# Altium PCB ir-rf.PcbDoc
Units mm, origin at the board's own origin, x right, y up, seen from the top; angles counter-clockwise.
Board outline 151 x 86.38 mm, 2 copper layers (Top Layer, Bottom Layer); 16 components, 13 nets, 56 pads, 0 vias.
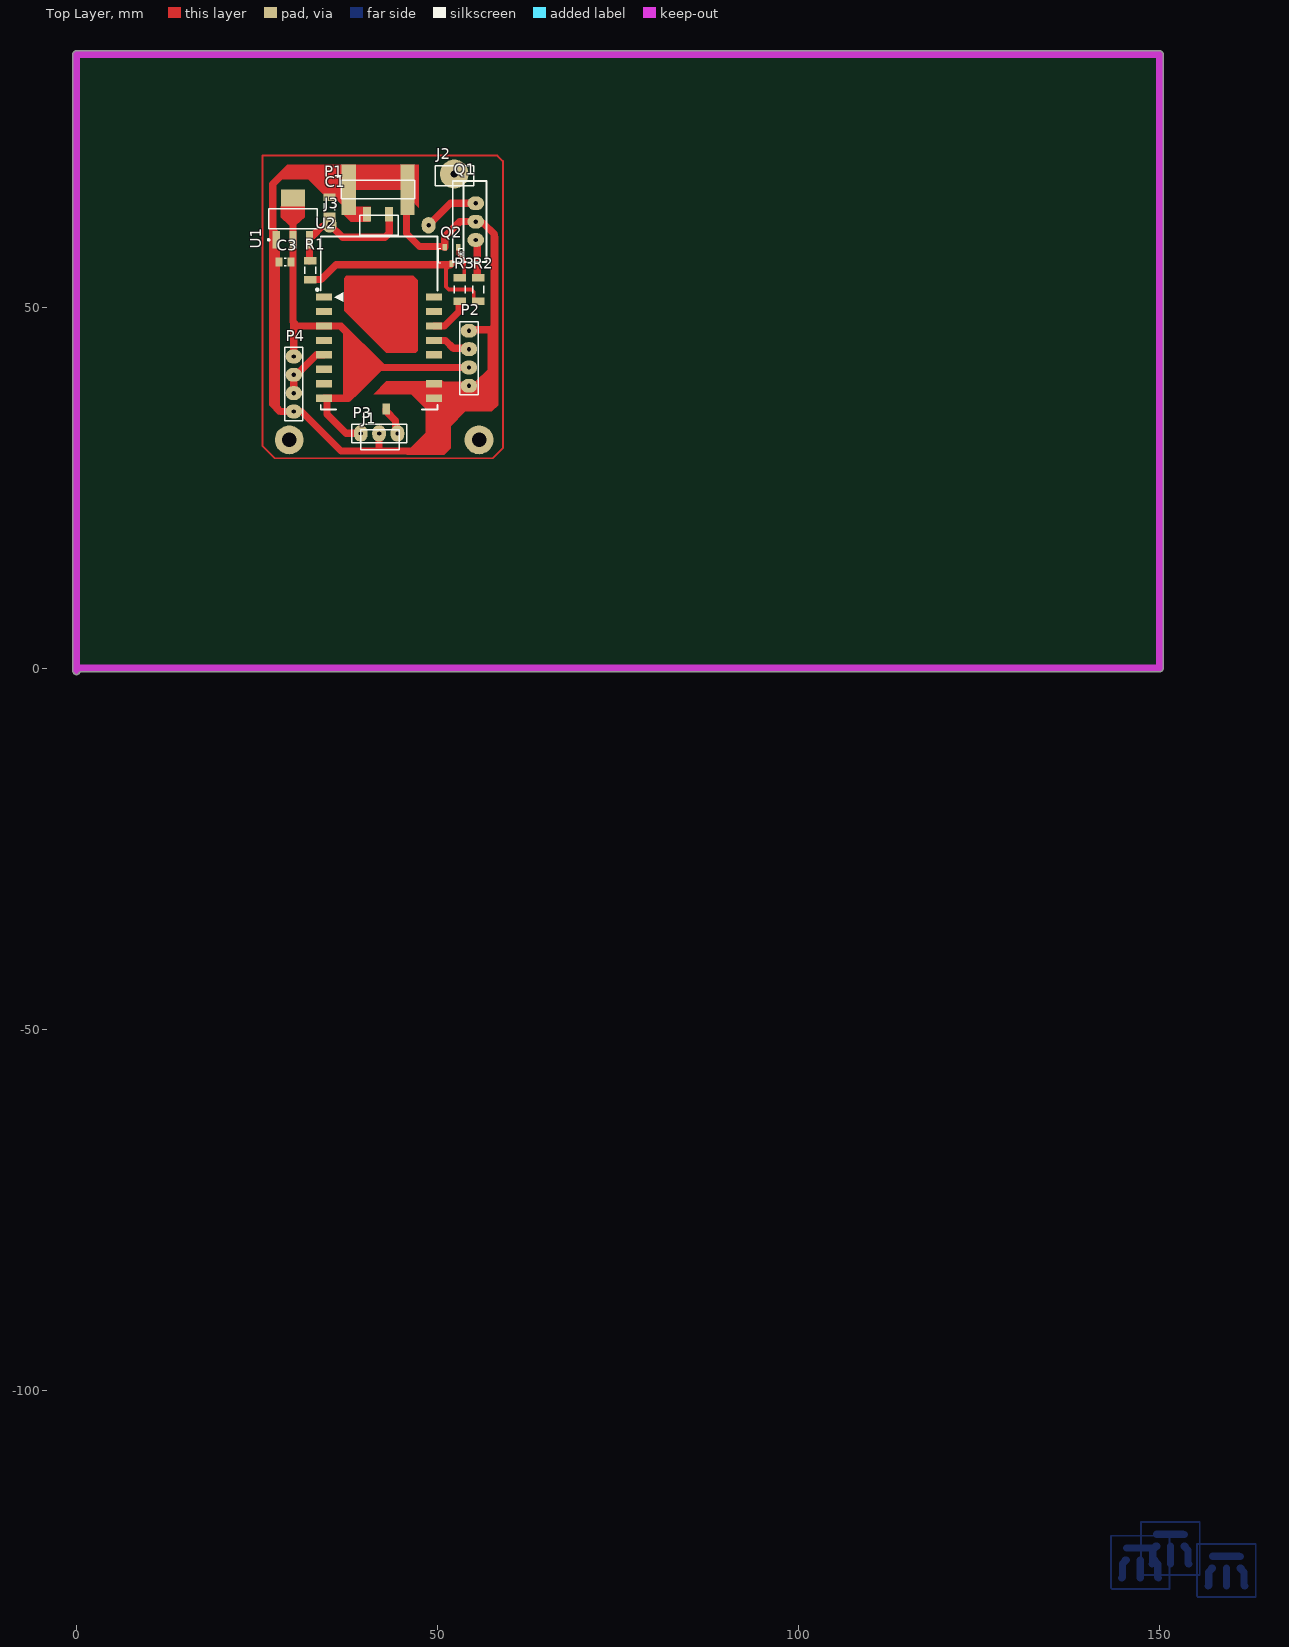
[diagram p0: Top Layer view]
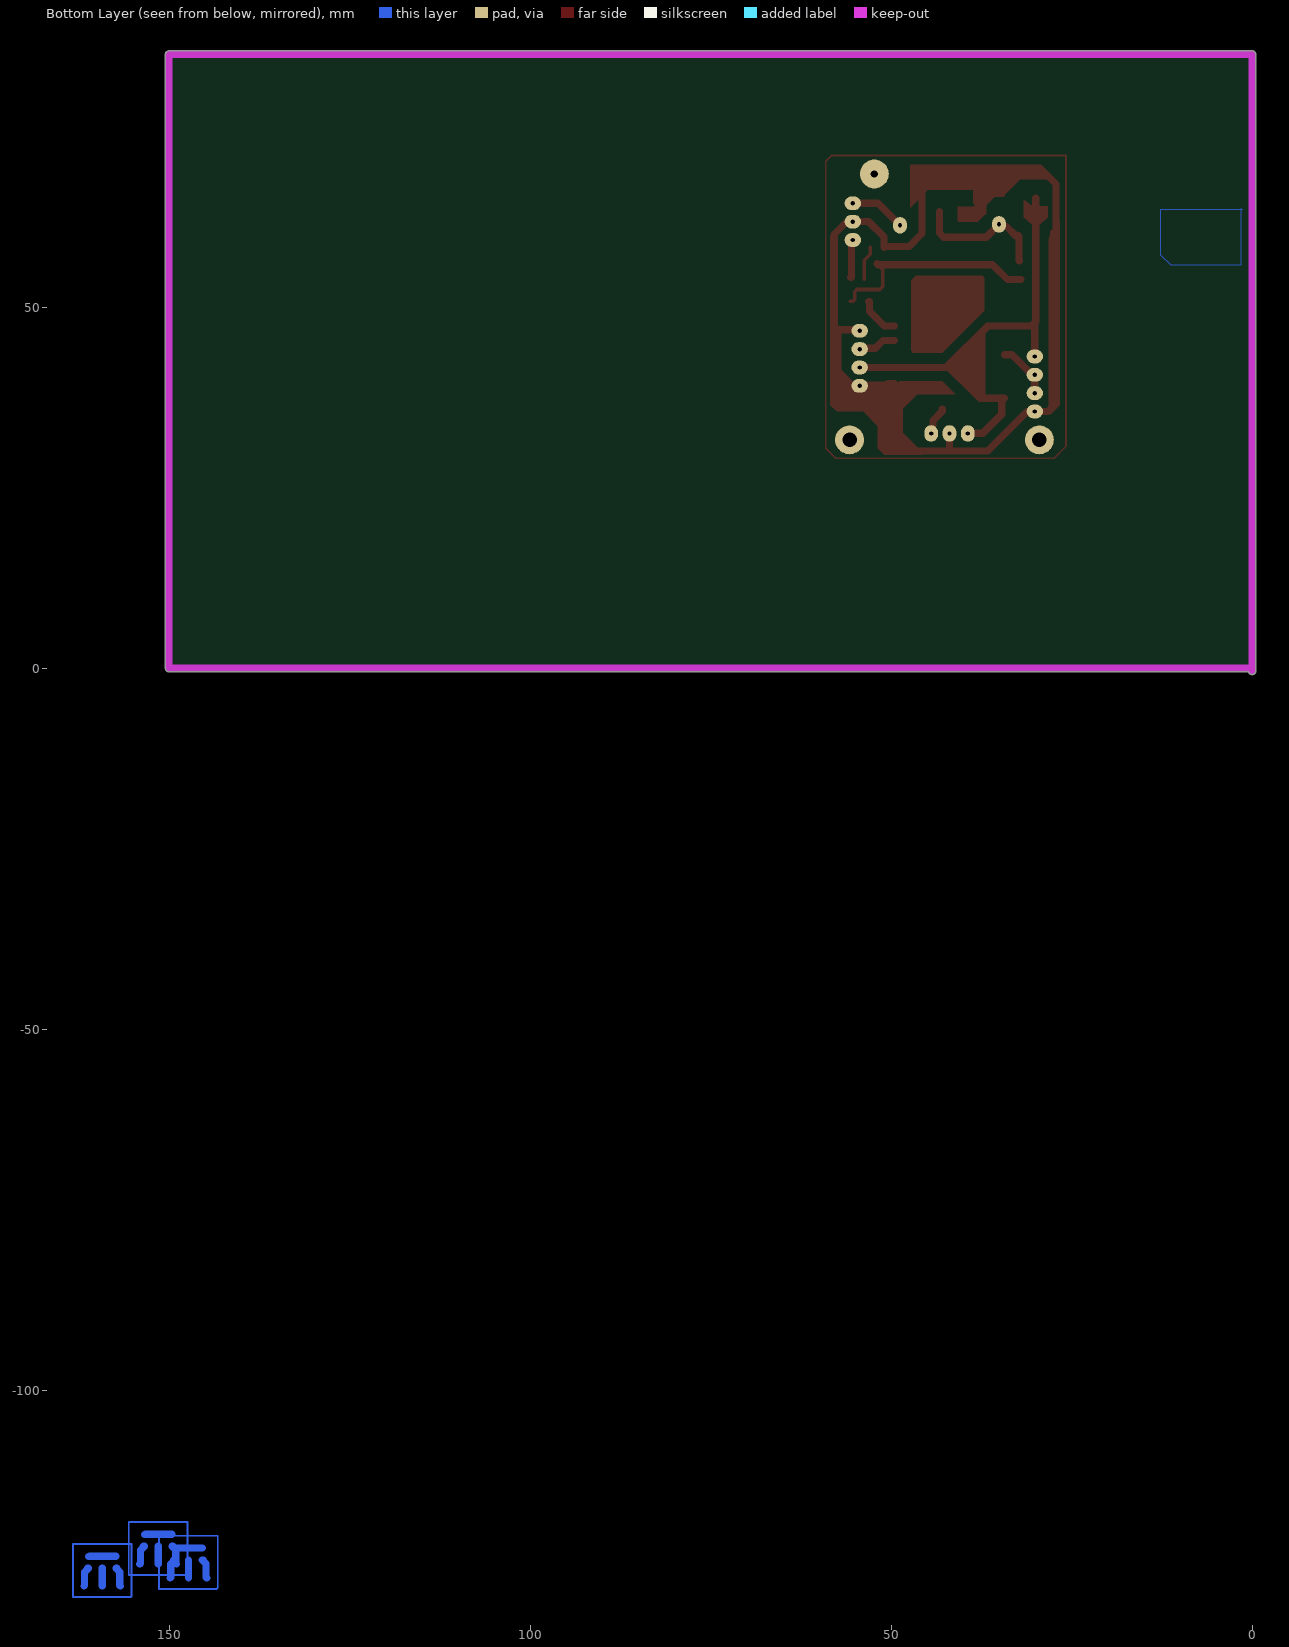
[diagram p1: Bottom Layer view, seen from below]
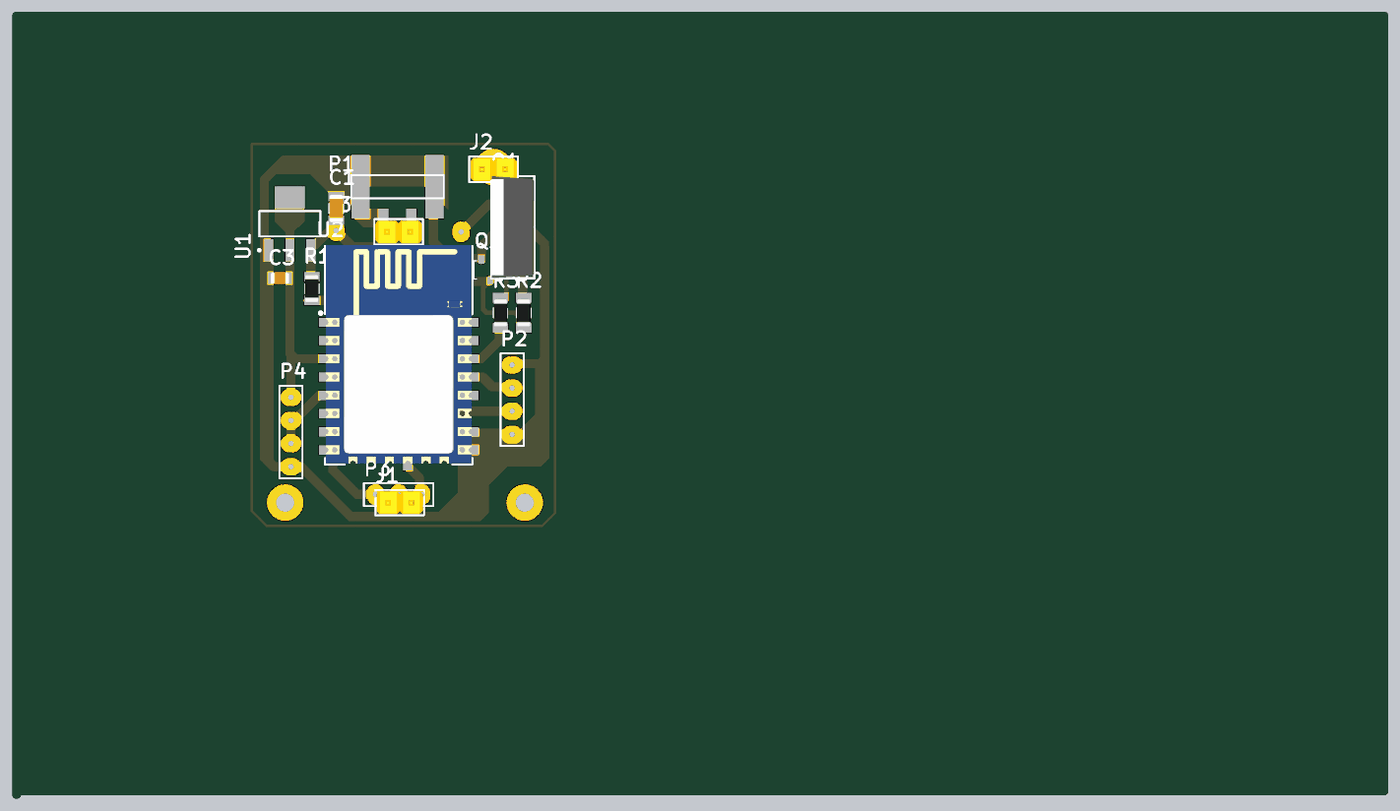
[diagram p2: 3D render of the assembled board from above, using the file's embedded part models]

## Layer stack, top to bottom
Top Solder: solder mask 0.0102, Solder Resist, Dk 3.5
Top Layer: signal copper 0.0356
Dielectric 1: dielectric 0.32, FR-4, Dk 4.8
Bottom Layer: signal copper 0.0356
Bottom Solder: solder mask 0.0102, Solder Resist, Dk 3.5

## Board outline
-0.5,-0.381 -0.5,85 cw(c0,85) 0,85.5 150,85.5 cw(c150,85) 150.5,85 150.5,0 cw(c150,0) 150,-0.5 0.486,-0.5 cw(c0,-0.381)

## Design rules (kind name [scope] priority, off if disabled: settings)
Clearance Clearance_1 [InPolygon] p1: gap=0.8 ignorepadtopadclearanceinfootprint=FALSE
Clearance [All] p2: gap=0.254 ignorepadtopadclearanceinfootprint=FALSE except(0: Arc-Hole Track-Hole SMDPad-Hole THPad-Hole Via-Hole Fill-Hole Poly-Hole Region-Hole Text-Hole)
PolygonConnect [All] p1: connectstyle=Relief reliefconductorwidth=0.254 reliefentries=4 polygonreliefangle="90 Angle" airgapwidth=0.254
RoomDefinition ir-rf [InComponentClass('ir-rf')] p1: confinementstyle=ConfineIn formatcopy=TRUE lockcomponents=FALSE outline 144.907,-4.953 247.904,-4.953 247.904,23.114 144.907,23.114
RoutingLayers [All] p1: top layer_v5=FALSE bottom layer_v5=TRUE
RoutingVias [All] p1: holewidth=0.711 width=2.5 viastyle="Through Hole" minholewidth=0.711 minwidth=1.27 maxholewidth=0.711 maxwidth=2
SolderMaskExpansion [All] p1: expansion=0.102 istentingtop=FALSE
Width [All] p1: maxlimit=3 minlimit=0.5 preferedwidth=1
29 further rules are at their usual default settings.

## Components (designator, comment, footprint, x,y, rotation, side; value= is the part's Value field where it differs from the comment)
C1 "=Value" "CAP 1206" 35.052,63.881 r90 top
C3 "=Value" "CAP 0805" 28.829,56.261 r180 top
J1 "Header2X1" "Header 2X1"#1 42.037,31.623 r180 top
J2 "Header2X1" "Header 2X1"#2 52.324,68.199 r180 top
J3 "Header2X1" "Header 2X1"#3 41.91,61.341 r180 top
P1 "Header 4" HDR1X4#1 45.593,66.294 r180 top
P2 "Header 4" HDR1X4#2 54.356,46.736 r270 top
P3 "Header 3" HDR1X3 44.45,32.512 r180 top
P4 "Header 4" HDR1X4#2 30.099,43.18 r270 top
Q1 "MODEL" TO-220 55.297,61.849 r90 top
Q2 "MMBT3904-TP" SOT23-3 53.213,57.157 r180 top
R1 "10K" "RES 1206 (3216X08L)"#1 32.385,55.118 r90 top
R2 "10K" "RES 1206 (3216X08L)"#2 55.626,52.451 r90 top
R3 "10K" "RES 1206 (3216X08L)"#2 53.086,52.451 r90 top
U1 "LM1117MP-3.3" MP04A_N 29.972,62.23 r90 top
U2 "ESP_12_E" ESP_12_E 33.905,51.403 r0 top

## Footprints (in the part's own frame and the unit in brackets; to place one, negate y for a bottom-side part, rotate by r counter-clockwise, add the part's x,y. Pads: shape width x height; smd on the part's side, far side on the other; paste and mask are expansions set on the pad)
"CAP 0805" [mm]
  rect 0.95x1.3 smd: 1(-0.889,0) 2(0.761,0)
  silkscreen extent -0.21,-0.55 0.09,0.55, body extent -1.08,-0.63 0.95,0.63, height 0.65
"CAP 1206" [mm]
  rect 1.05x1.7 smd: 1(-1.27,0) 2(1.326,0)
  silkscreen extent -0.47,-0.75 0.53,0.75, body extent -1.49,-0.77 1.55,0.75, height 0.75
ESP_12_E [mm] "ESP-12 Wi-Fi Module by AI-Thinker"
  rect 2.25x1 smd: 1(0.375,0) 2(0.375,-2) 3(0.375,-4) 4(0.375,-6) 5(0.375,-8) 6(0.375,-10) 7(0.375,-12) 8(0.375,-14) 15(15.625,-14) 16(15.625,-12) 18(15.625,-8) 19(15.625,-6) 20(15.625,-4) 21(15.625,-2) 22(15.625,0)
  rect 1x1.5 smd: 12(9,-15.5)
  silkscreen extent -0.7,-15.57 16.08,8.37, body extent 0,-15.49 16,8.51, height 2.75
HDR1X3 [mm] "Connector; Header; 3 Position"
  oval 1.905x2.286 hole 0.6: 1(0,0) 2(2.54,0) 3(5.08,0)
  silkscreen extent -1.27,-1.27 6.35,1.27
HDR1X4#1 [mm] "Connector; Header; 4 Position"
  rect 2x7 smd: 1(-0.254,0) 4(7.874,0)
  rect 1.1x2 smd: 2(2.286,3.429) 3(5.334,3.429)
  silkscreen extent -1.27,-1.27 8.89,1.27
HDR1X4#2 [mm] "Connector; Header; 4 Position"
  oval 1.905x2.286 hole 0.6: 1(0,0) 2(2.54,0) 3(5.08,0) 4(7.62,0)
  silkscreen extent -1.27,-1.27 8.89,1.27
"Header 2X1"#1 [mm]
  round 4 hole 2: 1(-13.716,0) 2(12.573,0)
  silkscreen extent -2.67,-1.4 2.67,1.4, body extent -2.54,-1.27 2.54,1.27, height 9.5
"Header 2X1"#2 [mm]
  round 4 hole 1: 2(0,-0.254)
  silkscreen extent -2.67,-1.4 2.67,1.4, body extent -2.54,-1.27 2.54,1.27, height 9.5
"Header 2X1"#3 [mm]
  oval 1.905x2.286 hole 0.6: 1(-6.858,0) 2(6.858,-0.127)
  silkscreen extent -2.67,-1.4 2.67,1.4, body extent -2.54,-1.27 2.54,1.27, height 9.5
MP04A_N [mm] "SOT223, 4-Leads, Body 6.5x3.5mm, Pitch 2.3mm, Lead Span 7mm, IPC Medium Density"
  rect 2.4x1 smd: 1(-2.9,2.3) 2(-2.9,0) 3(-2.9,-2.3)
  rect 2.4x3.3 smd: 4(2.9,0)
  silkscreen extent -3.02,-3.35 1.4,3.47, body extent -1.85,-3.35 1.85,3.35, height 1.8
"RES 1206 (3216X08L)"#1 [mm] "Chip Resistor, 2-Leads, Body 3.2x1.6mm, IPC High Density _ (0.125 W)"
  rect 1.05x1.7 smd: 1(-1.295,0) 2(1.301,0)
  silkscreen extent -0.5,-0.75 0.5,0.75, body extent -1.52,-0.76 1.53,0.76, height 0.6
"RES 1206 (3216X08L)"#2 [mm] "Chip Resistor, 2-Leads, Body 3.2x1.6mm, IPC High Density _ (0.125 W)"
  rect 1.05x1.7 smd: 1(-1.651,0) 2(1.651,0)
  silkscreen extent -0.5,-0.75 0.5,0.75, body extent -1.52,-0.76 1.53,0.76, height 0.6
SOT23-3 [mm]
  rect 0.6x0.9 smd: 1(0.32,-1.15) 2(2.22,-1.15) 3(1.27,1.15)
  silkscreen extent -0.48,-1 3.02,1
TO-220 [mm]
  oval 1.905x2.286 hole 0.6: 1(-2.54,0) 2(0,0) 3(2.54,0)
  silkscreen extent -5.61,-1.5 5.61,3.19, body extent -5.61,-1.5 5.61,3.19, height 19.83

## Part data
C1 C3: library part Capacitor, "Capacitor"
P1 P2 P4: "Header, 4-Pin", LatestRevisionDate=17-Jul-2002, LatestRevisionNote="Re-released for DXP Platform.", Publisher="Altium Limited"
P3: "Header, 3-Pin", LatestRevisionDate=17-Jul-2002, LatestRevisionNote="Re-released for DXP Platform.", Publisher="Altium Limited"
Q1: library part TIP127, "PNP Bipolar Transistor"
Q2: "Bipolar _BJT_ Transistor NPN 40V 200mA 300MHz 350mW Surface Mount SOT-23", Package="SOT-23 Micro Commercial", Availability=Unavailable, MF="Micro Commercial", MP=MMBT3904-TP, Price=None, SnapEDA_Link=https://www.snapeda.com/parts/MMBT3904-TP/Micro%20Commercial/view-part/805928/?ref=snap
R1 R2 R3: library part Resistor, "Resistor", Power="1/4 W", Tolerance=5%
U1: "800mA Low-Dropout Linear Regulator", DigiKeyPartNumber=LM1117MP-3.3CT-ND, Manufacturer="National Semiconductor", PackageTopMarking=XYTT*N05A, PowerWise=N, Code_IPC=SOT223-4, Code_JEDEC=TO-261-AA, ComponentLink1Description="LM1117 Datasheet", ComponentLink1URL=http://www.national.com/ds/LM/LM1117.pdf, ComponentLink2Description="LM1117 Web Page", ComponentLink2URL=http://www.national.com/pf/LM/LM1117.html, ComponentLink3Description="MP04A Package Page", ComponentLink3URL=http://www.national.com/packaging/folders/mp04a.html, CompType="LDO IC", DatasheetVersion=Apr-2006, PackageDescription="Molded SOT-223, 6.50 x 3.56 x 1.6mm Body, 4 Lead, 2.3mm Pitch", PackageReference=MP04A, PackageVersion="revB, Apr-2003", PartNumber=LM1117MP-3.3, PinCount=4, Published=4-Dec-2008, Publisher="Altium Limited", RoHS=O
U2: "ESP-12 Wi-Fi Module by AI-Thinker", IC=ESP8266-EX, Vendor=Ai-thinker

## Nets (pads, with @x,y where several pads share a name; then routed paths per layer and width w, separated by ;. In a path a pad name is that pad's centre, name@x,y a point inside that pad or via, vN(x,y) a via of type N, cw(c..) or ccw(c..) an arc to the next point about the centre after c; other vN are vias at no path point)
btn: U2.18
GND: C1.2 C3.2 P1.1 P1.3 P1.4 P2.1 P2.4 P3.2 P4.4 Q1.2 Q2.2 U1.1 U2.15 U2.16 | length 136.1
  Top Layer w1: U1.1@27.545,59.903 27.178,60.27 27.178,67.056 29.337,69.215 37.219,69.215 38.1,68.334 P1.4@38.1,66.675 ; U1.1 27.672,58.337 27.686,58.323 27.686,36.146 28.272,35.56 P4.4 31.159,35.56 36.62,30.099 41.91,30.099 ; P3.2 41.91,30.099 ; P1.1@45.72,66.675 45.72,60.198 47.498,58.42 50.88,58.42 Q2.2 50.993,59.756 53.086,61.849 Q1.2@55.51,61.849 ; U2.15 U2.15@50.038,37.403 ; U2.16 50.448,39.403 50.608,39.243 53.875,39.243 53.907,39.212 54.26,39.212 P2.4 54.452,39.212 54.805,39.212 54.837,39.243 55.499,39.243 57.404,41.148 57.404,46.863 ; U2.16@50.038,39.403 U2.15@50.038,37.403 ; P2.1 54.483,46.863 57.404,46.863 ; Q1.2 55.47,61.676 56.307,61.676 57.912,60.071 57.912,47.371 57.404,46.863 ; 41.91,30.099 46.482,30.099 52.372,35.989 52.372,36.817 51.786,37.403 U2.15@50.038,37.403
ir-r: P3.1 U2.12 | length 4
  Top Layer w1: U2.12 42.905,35.581 44.2,34.286 44.2,33.592 44.277,33.516 44.277,32.685 P3.1
NetJ3_1: J3.1 Q1.3 | length 7.8
  Top Layer w1: J3.1 51.816,64.389 Q1.3
NetQ1_1: Q1.1 R2.2 | length 5.4
  Top Layer w1: Q1.1 55.499,59.107 55.499,54.127 55.524,54.102 R2.2
NetQ2_1: Q2.1 R3.2 | length 4.8
  Top Layer w0.5: Q2.1 52.893,57.343 53.721,56.515 R3.2@53.721,53.848
NetQ2_3: Q2.3 R1.1 R2.1 | length 30.3
  Top Layer w0.5: Q2.3 51.943,55.857 51.893,55.807 51.743,55.807 51.181,55.245 51.181,52.832 51.562,52.451 54.733,52.451 55.026,52.158 55.026,51.075 55.301,50.8 R2.1
  Top Layer w1: R1.1@32.004,53.823 33.884,53.823 35.941,55.88 51.816,55.88 Q2.3
o1: R3.1 U2.20 | length 5.8
  Top Layer w1: U2.20 50.959,47.403 52.973,49.417 52.973,50.775 52.998,50.8 R3.1
rf-r: P4.2 P4.3 U2.5 | length 7.9
  Top Layer w1: P4.3 P4.2 30.48,40.64 33.243,43.403 U2.5
rf-t: P2.2 U2.19 | length 5.3
  Top Layer w1: U2.19 51.117,45.403 52.197,44.323 53.875,44.323 53.907,44.292 54.26,44.292 P2.2
rst: U2.1
vdD: C1.1 J3.2 P1.2 R1.2 U1.3 | length 19.1
  Top Layer w1: R1.2@32.247,56.419 32.272,56.444 U1.3 32.272,59.776 32.399,59.903 32.725,59.903 34.014,61.192 34.693,61.192 J3.2@35.052,61.552 ; J3.2 36.83,59.69 42.721,59.69 43.307,60.276 P1.2@43.307,63.238
vesp: C3.1 P2.3 P3.3 P4.1 U1.2 U1.4 U2.3 U2.8 | length 66.2
  Top Layer w1: U1.4 U1.2 29.972,47.989 30.099,47.862 ; P4.1@30.099,43.942 30.099,47.403 30.099,47.862 ; U2.8 U2.8@34.681,37.403 ; P3.3@39.581,32.531 37.319,32.531 34.681,35.169 U2.8@34.681,37.403 ; P2.3 41.91,41.656 ; 30.099,47.862 30.558,47.403 U2.3 36.544,47.403 40.767,43.18 40.767,42.242 41.353,41.656 41.91,41.656 ; U2.8@34.681,37.403 37.657,37.403 41.91,41.656
pads on no net: J1.1 J1.2 J2.2 U2.2 U2.4 U2.6 U2.7 U2.21 U2.22
copper on no net: | length 276.6
  Top Layer w0.254: 25.781,30.734 27.432,29.083 57.658,29.083 59.055,30.48 59.055,70.231 58.293,70.993 25.781,70.993 25.781,30.734
  Bottom Layer w0.254: 143.256,-127.381 143.256,-120.142 143.51,-120.142 151.384,-120.142 151.384,-127.508 143.383,-127.508 143.256,-127.381 ; 147.447,-125.476 147.447,-118.237 147.701,-118.237 155.575,-118.237 155.575,-125.603 147.574,-125.603 147.447,-125.476 ; 155.194,-128.524 155.194,-121.285 155.448,-121.285 163.322,-121.285 163.322,-128.651 155.321,-128.651 155.194,-128.524
  Bottom Layer w1: 144.78,-125.984 144.876,-125.888 144.876,-124.033 145.265,-123.644 145.265,-123.519 145.29,-123.494 145.415,-123.494 ; 145.415,-121.844 149.074,-121.844 149.1,-121.87 149.225,-121.87 ; 147.32,-125.984 147.32,-123.52 ; 148.971,-124.079 149.067,-123.983 149.067,-122.128 149.456,-121.739 149.456,-121.614 149.481,-121.589 149.606,-121.589 ; 149.225,-123.52 149.35,-123.52 149.375,-123.545 149.375,-123.67 149.764,-124.06 149.764,-125.888 149.86,-125.984 ; 149.606,-119.939 153.265,-119.939 153.291,-119.965 153.416,-119.965 ; 151.511,-124.079 151.511,-121.615 ; 153.416,-121.615 153.541,-121.615 153.566,-121.64 153.566,-121.765 153.955,-122.155 153.955,-123.983 154.051,-124.079 ; 156.718,-127.127 156.814,-127.031 156.814,-125.176 157.203,-124.787 157.203,-124.662 157.228,-124.637 157.353,-124.637 ; 157.353,-122.987 161.012,-122.987 161.038,-123.013 161.163,-123.013 ; 159.258,-127.127 159.258,-124.663 ; 161.163,-124.663 161.288,-124.663 161.313,-124.688 161.313,-124.813 161.702,-125.203 161.702,-127.031 161.798,-127.127

## Polygon pours and split planes (outlines as drawn)
no net on Bottom Layer "NONET_L02_P003" (solid, shelved, pour order 3): 1.397,63.5 12.7,63.5 12.7,57.277 11.303,55.88 1.524,55.88 1.524,63.627
no net on Bottom Layer "NONET_L02_P001" (solid, pour order 1): 6.985,67.691

## Keep-outs
Keep-Out Layer:
  lines w1: 0,-0.381 0,22.86 0,67.945 0,85 150,85 150,0 0,0

## Other copper
Top Layer:
  region net GND: 34.163,65.659 31.623,68.199 31.623,68.834 34.544,68.834 35.56,67.818 35.56,65.278 34.417,65.278
  region: 37.338,54.356 46.609,54.356 47.244,53.721 47.244,43.942 46.99,43.688 42.926,43.688 37.084,49.53 37.084,53.975
  region net GND: 48.387,35.814 48.387,35.941 46.355,37.973 41.148,37.973 42.926,39.751 48.768,39.751 50.546,37.973 50.546,36.195
  region net vesp: 36.957,46.863 36.957,37.592 38.578,37.592 42.545,41.559 42.545,42.164 36.83,47.879 35.941,47.879
  region net vesp: 31.623,62.484 30.353,61.341 29.464,61.341 28.321,62.484 28.321,64.008 30.353,64.008 31.623,64.897
  region net GND: 48.387,32.639 48.387,39.624 55.372,39.624 57.404,41.656 57.404,60.071 57.785,60.452 58.42,59.817 58.42,56.261 58.42,36.449 57.531,35.56 53.848,35.56 51.816,33.528 51.816,30.48 50.927,29.591 45.72,29.591
  region net GND: 26.67,61.912 26.67,36.386 27.94,35.115 27.94,60.515 27.432,61.023
  region net GND: 36.83,62.865 36.957,62.865 37.973,61.849 40.64,61.849 40.767,61.976 40.767,63.881 38.608,63.881 38.354,64.135 38.608,64.389 38.608,66.294 44.958,66.294 47.371,63.754 47.371,69.723 29.21,69.723 28.321,68.834 28.321,67.818 28.448,67.691 33.274,67.691 36.83,64.135

## Text inside footprints (layer, text, board x,y; h text height)
Q2: Top Overlay "*" at 53.693,58.157 h1.27 r180
U2: Mechanical 13 "CUTOUT POLYGON" at 34.032,58.769 h0.25; Mechanical 13 "ANTENNA AREA" at 34.032,59.277 h0.25